# EAGLE board dynavo (EAGLE 7.4.0)
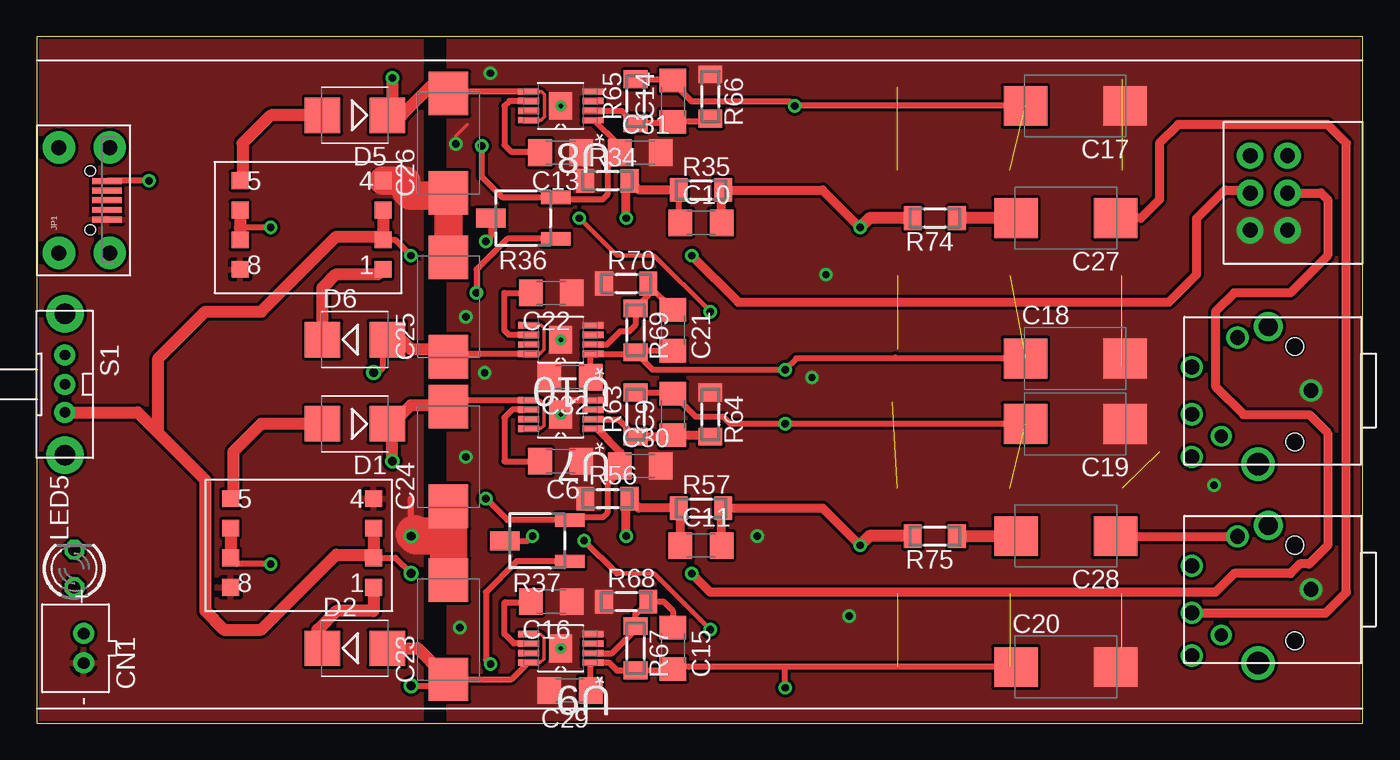
[diagram p0: board, top side]
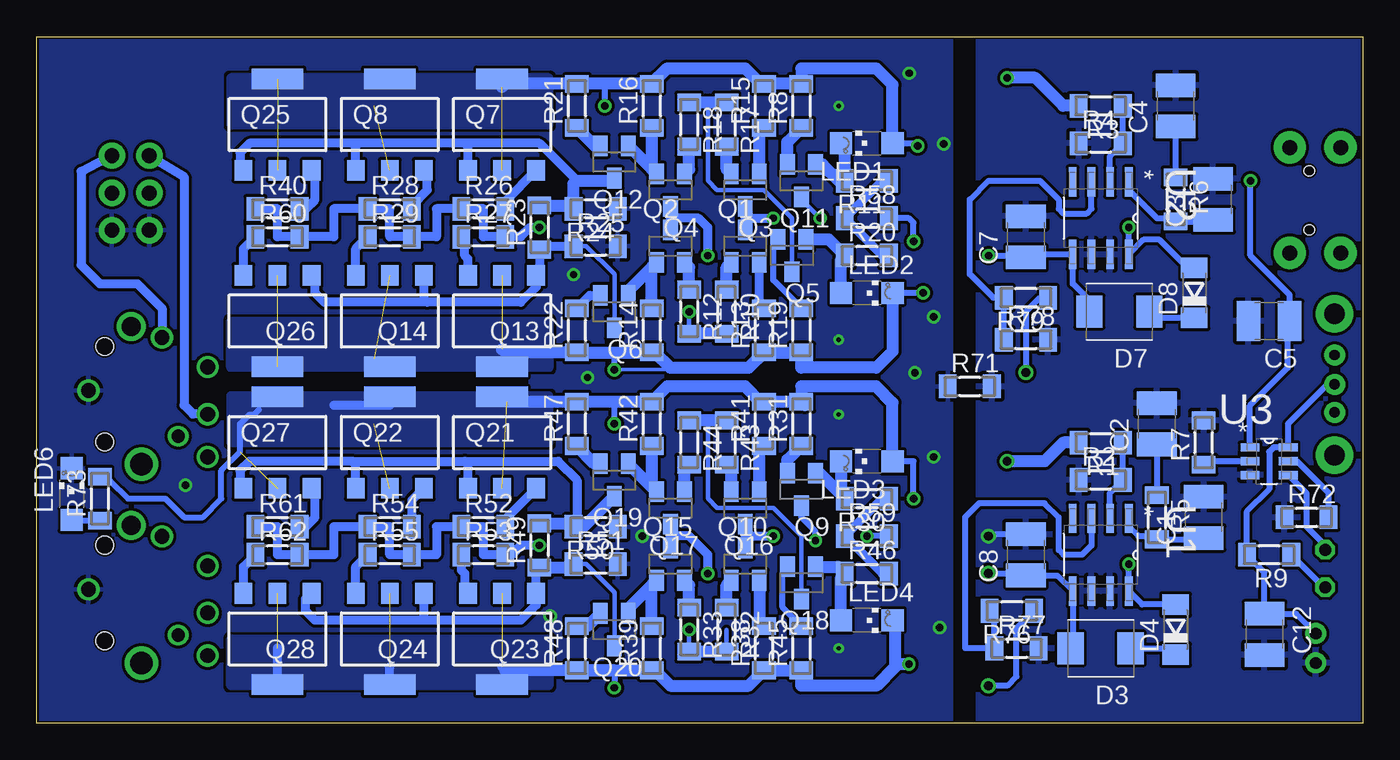
[diagram p1: board, bottom side, seen from below]

Size 90 x 46.6 mm. Coordinates in mm from the lower left corner, seen from the top.
Outline: 0,0 90,0 90,46.6 0,46.6 0,0
Copper layers (1*16): Top 0.035mm / dielectric 1.5mm / Bottom 0.035mm
Design rules "default *": minimum track width 10mil, minimum drill 12mil, track to track 8mil, track to pad 8mil, pad to pad 8mil, via to via 8mil, smd to smd 8mil, copper to edge 6mil, drill to drill 8mil, minimum pad ring 10mil, minimum via ring 8mil, stop-mask expansion 4mil, vias tented up to drill 0mil, thermal gap 10mil

## Footprints (pad centres in the part's own frame; a part is rotated, then mirrored left to right if it is on the bottom)
C1210 = smd 1.6 x 2.7: 1 -1.4,0; 2 1.4,0
C1206 = smd 1.6 x 1.8: 1 -1.4,0; 2 1.4,0
D/7343-31W = smd 2.95 x 2.7: + 3.375,0; - -3.375,0
JST-PH-2-THM = drill 0.8 pad 1.422: 1 1,0; 2 -1,0
SMB = smd 2.4 x 2.4: A 2.2,0; C -2.2,0
SMBJ = smd 1.78 x 2.16: A 2.04,0; C -2.03,0
SOD80C = smd 1.4 x 1.8: A 1.7,0; C -1.7,0
MICRO-B-SMT = smd 0.4 x 2: 1 1.3,-0.3; 2 0.65,-0.3; 3 0,-0.3; 4 -0.65,-0.3; 5 -1.3,-0.3 | drill 1.016 pad 2.2: P$6 -3.58,2.95; P$7 -3.58,-0.5; P$8 3.58,2.95; P$9 3.58,-0.5 | hole 0.7: -2,0.825; 2,0.825
CHIPLED_1206 = smd 1.5 x 1.5: A 0,-1.75; C 0,1.75
LED3MM = drill 0.813 octagon: A -1.27,0; K 1.27,0
SOT23 = smd 1 x 1.4: 1 -0.95,-1.1; 2 0.95,-1.1; 3 0,1.1
SOT23-BEC = smd 1 x 1.4: B -0.95,-1.1; C 0,1.1; E 0.95,-1.1
SOT223R_INFINEON = smd 1.2 x 1.4: 1 -2.311,-3.099; 2 0,-3.099; 3 2.311,-3.099 | smd 3.5 x 1.4: 4 0,3.099
MINI_MELF-0204W = smd 1.2 x 1.6: 1 -1.5,0; 2 1.5,0
3223G = smd 2 x 0.9: 1 -2.2,1.4; 3 -2.2,-1.4 | smd 2 x 1.3: 2 2.2,0
EG1213 = drill 0.7 pad 1.422: 1 -2,0; 2 0,0; 3 1.9,0 | drill 1.4 pad 2.54: MT1 -4.8,0; MT2 4.8,0
LPE4841 = smd 1.143 x 1.143: 1 0,6.02; 2 0,4.013; 3 0,2.007; 4 0,0; 5 9.703,0; 6 9.703,2.007; 7 9.703,4.013; 8 9.703,6.02
SOIC127P600X175-8N = smd 1.981 x 0.533: 1 -2.464,1.905; 2 -2.464,0.635; 3 -2.464,-0.635; 4 -2.464,-1.905; 5 2.464,-1.905; 6 2.464,-0.635; 7 2.464,0.635; 8 2.464,1.905
SOT-23-6 = smd 1.27 x 0.559: 1 -1.295,0.94; 2 -1.295,0; 3 -1.295,-0.94; 4 1.295,-0.94; 5 1.295,0; 6 1.295,0.94
SOP65P490X110-9N = smd 1.422 x 0.432: 1 -2.184,0.965; 2 -2.184,0.33; 3 -2.184,-0.33; 4 -2.184,-0.965; 5 2.184,-0.965; 6 2.184,-0.33; 7 2.184,0.33; 8 2.184,0.965 | smd 1.56 x 1.88: 9 0,0
FOXCON-PHONEJACK = drill 1: CS/ON -0.58,0; G -5.08,8.1; L -8.68,3.1; P$2 -6.68,0; R -3.48,0 | drill 0.9: P$1 -1.98,2 | drill 1.5: P$6 -0.08,4.5 | drill 1.3: P$7 -9.43,5.2 | hole 1.2: -8.08,7; -1.58,7
RK09 = drill 1.016 pad 1.778: G1 0,-2.54; G2 -2.54,-2.54; I1 0,2.54; I2 -2.54,2.54; O1 0,0; O2 -2.54,0

## Placement (x,y rotation side)
C1  [C1210]  10.79,13.97 90 bottom
C2  [C1210]  13.97,20.32 90 bottom
C3  [C1210]  10.16,35.56 90 bottom
C4  [C1210]  12.7,41.91 90 bottom
C5  [C1210]  6.35,27.3 180 bottom
C6  [C1206]  35.56,17.78 180 top
C7  [C1210]  22.86,33.02 90 bottom
C8  [C1210]  22.86,11.43 90 bottom
C9  [C1206]  43.18,20.95 90 top
C10  [C1206]  45.09,33.97 0 top
C11  [C1206]  45.09,12.06 0 top
C12  [C1210]  6.67,6.03 270 bottom
C13  [C1206]  35.56,38.73 180 top
C14  [C1206]  43.18,42.23 90 top
C15  [C1206]  43.18,5.08 270 top
C16  [C1206]  34.92,8.26 180 top
C17  [D/7343-31W]  70.48,41.91 180 top
C18  [D/7343-31W]  70.48,24.77 0 top
C19  [D/7343-31W]  70.48,20.32 180 top
C20  [D/7343-31W]  69.85,3.81 0 top
C21  [C1206]  43.18,26.67 270 top
C22  [C1206]  34.92,29.21 180 top
C23  [D/7343-31W]  27.94,6.35 90 top
C24  [D/7343-31W]  27.94,18.1 90 top
C25  [D/7343-31W]  27.94,28.26 90 top
C26  [D/7343-31W]  27.94,39.37 90 top
C27  [D/7343-31W]  69.85,34.29 180 top
C28  [D/7343-31W]  69.85,12.7 180 top
C29  [C1206]  36.2,2.22 180 top
C30  [C1206]  40.96,17.46 0 top
C31  [C1206]  40.96,38.73 0 top
C32  [C1206]  36.2,23.5 180 top
CN1  [JST-PH-2-THM]  3.17,5.08 90 top
D1  MBRS130LT3  [SMB]  21.59,20.32 180 top
D2  MBRS130LT3  [SMB]  21.59,5.08 0 top
D3  P6KEXX  [SMBJ]  17.78,5.08 180 bottom
D4  1n4148  [SOD80C]  12.7,6.35 90 bottom
D5  MBRS130LT3  [SMB]  21.59,41.27 180 top
D6  MBRS130LT3  [SMB]  21.59,26.04 0 top
D7  P6KEXX  [SMBJ]  16.51,27.94 180 bottom
D8  1n4148  [SOD80C]  11.43,29.21 90 bottom
JP1  [MICRO-B-SMT]  4.45,35.5 90 top
LED1  1.6V  [CHIPLED_1206]  33.66,39.37 90 bottom
LED2  1.6V  [CHIPLED_1206]  33.66,29.21 270 bottom
LED3  1.6V  [CHIPLED_1206]  33.66,17.78 90 bottom
LED4  1.6V  [CHIPLED_1206]  33.66,6.99 270 bottom
LED5  [LED3MM]  2.54,10.5 90 top
LED6  1.6V  [CHIPLED_1206]  87.63,15.56 0 bottom
Q1  2SJ74  [SOT23]  41.91,32.38 0 bottom
Q2  2SJ74  [SOT23]  46.99,32.38 0 bottom
Q3  2SK170  [SOT23]  41.91,36.2 180 bottom
Q4  2SK170  [SOT23]  46.99,36.2 180 bottom
Q5  BC850SMD  [SOT23-BEC]  38.73,31.75 180 bottom
Q6  BC850SMD  [SOT23-BEC]  50.8,27.94 180 bottom
Q7  PZTA06  [SOT223R_INFINEON]  58.42,40.64 0 bottom
Q8  PZTA06  [SOT223R_INFINEON]  66.04,40.64 0 bottom
Q9  2SA1015  [SOT23-BEC]  38.1,15.88 180 bottom
Q10  2SJ74  [SOT23]  41.91,10.79 0 bottom
Q11  2SA1015  [SOT23-BEC]  38.1,36.83 180 bottom
Q12  2SA1015  [SOT23-BEC]  50.8,38.1 180 bottom
Q13  2SA1015  [SOT223R_INFINEON]  58.42,27.3 180 bottom
Q14  2SA1015  [SOT223R_INFINEON]  66.04,27.3 180 bottom
Q15  2SJ74  [SOT23]  46.99,10.79 0 bottom
Q16  2SK170  [SOT23]  41.91,14.61 180 bottom
Q17  2SK170  [SOT23]  46.99,14.61 180 bottom
Q18  BC850SMD  [SOT23-BEC]  38.1,9.53 180 bottom
Q19  2SA1015  [SOT23-BEC]  50.8,16.51 180 bottom
Q20  BC850SMD  [SOT23-BEC]  50.8,6.35 180 bottom
Q21  PZTA06  [SOT223R_INFINEON]  58.42,19.05 0 bottom
Q22  PZTA06  [SOT223R_INFINEON]  66.04,19.05 0 bottom
Q23  2SA1015  [SOT223R_INFINEON]  58.42,5.71 180 bottom
Q24  2SA1015  [SOT223R_INFINEON]  66.04,5.71 180 bottom
Q25  PZTA06  [SOT223R_INFINEON]  73.66,40.64 0 bottom
Q26  2SA1015  [SOT223R_INFINEON]  73.66,27.3 180 bottom
Q27  PZTA06  [SOT223R_INFINEON]  73.66,19.05 0 bottom
Q28  2SA1015  [SOT223R_INFINEON]  73.66,5.71 180 bottom
R1  [MINI_MELF-0204W]  17.78,19.05 180 bottom
R2  [MINI_MELF-0204W]  17.78,16.51 0 bottom
R3  [MINI_MELF-0204W]  17.78,41.91 180 bottom
R4  [MINI_MELF-0204W]  17.78,39.37 0 bottom
R5  [MINI_MELF-0204W]  13.97,13.97 270 bottom
R6  [MINI_MELF-0204W]  12.7,35.56 270 bottom
R7  [MINI_MELF-0204W]  10.79,19.05 90 bottom
R8  402  [MINI_MELF-0204W]  38.1,41.91 90 bottom
R9  [MINI_MELF-0204W]  6.35,11.43 180 bottom
R10  200  [MINI_MELF-0204W]  43.18,27.94 270 bottom
R11  10k  [MINI_MELF-0204W]  33.66,36.83 180 bottom
R12  200  [MINI_MELF-0204W]  45.72,27.94 270 bottom
R13  5k  [MINI_MELF-0204W]  40.64,26.67 90 bottom
R14  5k  [MINI_MELF-0204W]  48.26,26.67 90 bottom
R15  5k  [MINI_MELF-0204W]  40.64,41.91 90 bottom
R16  5k  [MINI_MELF-0204W]  48.26,41.91 90 bottom
R17  200  [MINI_MELF-0204W]  43.18,40.64 270 bottom
R18  200  [MINI_MELF-0204W]  45.72,40.64 270 bottom
R19  402  [MINI_MELF-0204W]  38.1,26.67 90 bottom
R20  10k  [MINI_MELF-0204W]  33.66,31.75 0 bottom
R21  402  [MINI_MELF-0204W]  53.34,41.91 90 bottom
R22  402  [MINI_MELF-0204W]  53.34,26.67 90 bottom
R23  240  [MINI_MELF-0204W]  55.88,33.66 90 bottom
R24  3k  [MINI_MELF-0204W]  52.07,34.92 180 bottom
R25  3k  [MINI_MELF-0204W]  52.07,32.38 0 bottom
R26  20  [MINI_MELF-0204W]  59.69,34.92 0 bottom
R27  20  [MINI_MELF-0204W]  59.69,33.02 0 bottom
R28  20  [MINI_MELF-0204W]  66.04,34.92 0 bottom
R29  20  [MINI_MELF-0204W]  66.04,33.02 0 bottom
R30  10k  [MINI_MELF-0204W]  33.66,15.24 180 bottom
R31  402  [MINI_MELF-0204W]  38.1,20.32 90 bottom
R32  200  [MINI_MELF-0204W]  43.18,6.35 270 bottom
R33  200  [MINI_MELF-0204W]  45.72,6.35 270 bottom
R34  1k  [MINI_MELF-0204W]  38.73,36.83 0 top
R35  10k  [MINI_MELF-0204W]  45.09,36.2 0 top
R36  [3223G]  33.02,34.29 180 top
R37  [3223G]  33.97,12.38 180 top
R38  5k  [MINI_MELF-0204W]  40.64,5.08 90 bottom
R39  5k  [MINI_MELF-0204W]  48.26,5.08 90 bottom
R40  20  [MINI_MELF-0204W]  73.66,34.92 0 bottom
R41  5k  [MINI_MELF-0204W]  40.64,20.32 90 bottom
R42  5k  [MINI_MELF-0204W]  48.26,20.32 90 bottom
R43  200  [MINI_MELF-0204W]  43.18,19.05 270 bottom
R44  200  [MINI_MELF-0204W]  45.72,19.05 270 bottom
R45  402  [MINI_MELF-0204W]  38.1,5.08 90 bottom
R46  10k  [MINI_MELF-0204W]  33.66,10.16 0 bottom
R47  402  [MINI_MELF-0204W]  53.34,20.32 90 bottom
R48  402  [MINI_MELF-0204W]  53.34,5.08 90 bottom
R49  240  [MINI_MELF-0204W]  55.88,12.06 90 bottom
R50  3k  [MINI_MELF-0204W]  52.07,13.34 180 bottom
R51  3k  [MINI_MELF-0204W]  52.07,10.79 0 bottom
R52  20  [MINI_MELF-0204W]  59.69,13.34 0 bottom
R53  20  [MINI_MELF-0204W]  59.69,11.43 0 bottom
R54  20  [MINI_MELF-0204W]  66.04,13.34 0 bottom
R55  20  [MINI_MELF-0204W]  66.04,11.43 0 bottom
R56  1k  [MINI_MELF-0204W]  38.73,15.24 0 top
R57  10k  [MINI_MELF-0204W]  45.09,14.61 0 top
R58  10k  [MINI_MELF-0204W]  33.66,34.29 0 bottom
R59  10k  [MINI_MELF-0204W]  33.66,12.7 0 bottom
R60  20  [MINI_MELF-0204W]  73.66,33.02 0 bottom
R61  20  [MINI_MELF-0204W]  73.66,13.34 0 bottom
R62  20  [MINI_MELF-0204W]  73.66,11.43 0 bottom
R63  [MINI_MELF-0204W]  40.64,20.95 90 top
R64  [MINI_MELF-0204W]  45.72,20.95 270 top
R65  [MINI_MELF-0204W]  40.64,42.23 90 top
R66  [MINI_MELF-0204W]  45.72,42.55 270 top
R67  [MINI_MELF-0204W]  40.64,5.08 270 top
R68  [MINI_MELF-0204W]  40.01,8.26 0 top
R69  [MINI_MELF-0204W]  40.64,26.67 270 top
R70  [MINI_MELF-0204W]  40.01,29.84 0 top
R71  [MINI_MELF-0204W]  26.67,22.86 0 bottom
R72  [MINI_MELF-0204W]  3.81,13.97 0 bottom
R73  402  [MINI_MELF-0204W]  85.72,15.24 90 bottom
R74  20  [MINI_MELF-0204W]  60.96,34.29 180 top
R75  20  [MINI_MELF-0204W]  60.96,12.7 180 top
R76  [MINI_MELF-0204W]  23.81,7.62 180 bottom
R77  [MINI_MELF-0204W]  23.5,5.08 0 bottom
R78  [MINI_MELF-0204W]  22.86,26.04 0 bottom
R79  [MINI_MELF-0204W]  22.86,28.89 180 bottom
S1  EG1213  [EG1213]  1.91,23 270 top
T1  LPE4841  [LPE4841]  22.86,15.24 180 top
T2  LPE4841  [LPE4841]  23.5,36.83 180 top
U1  LT1373CS8PBF  [SOIC127P600X175-8N]  17.78,11.43 270 bottom
U2  LT1373CS8PBF  [SOIC127P600X175-8N]  17.78,34.29 270 bottom
U3  BQ21040  [SOT-23-6]  6.35,17.78 0 bottom
U7  TPS7A4901DGNR  [SOP65P490X110-9N]  35.56,20.95 180 top
U8  TPS7A4901DGNR  [SOP65P490X110-9N]  35.56,41.91 180 top
U9  TPS7A3001DGNR  [SOP65P490X110-9N]  35.56,5.08 180 top
U10  TPS7A3001DGNR  [SOP65P490X110-9N]  35.56,26.04 180 top
U$2  HPJACK  [FOXCON-PHONEJACK]  78.4,4 270 top
U$3  HPJACK  [FOXCON-PHONEJACK]  78.4,17.5 270 top
U$4  ALPS_RK09  [RK09]  84.9,36 0 top

## Library data of the parts
C1-C32 R1-R35 R38-R79 T1 T2 U3 U$2 U$3 = Vwvwbg
CN1 S1 = adafruit
D1-D8 = diode
JP1 = SparkFun-Connectors; PROD_ID: CONN-09900
LED1-LED6 = led
Q1-Q4 Q10 Q15-Q17 = transistor-small-signal
Q5-Q8 Q18 Q20-Q22 Q25 Q27 = tranzistory SMD NPN
Q9 Q11-Q14 Q19 Q23 Q24 Q26 Q28 = tranzistory SMD PNP
R36 R37 = pot
U1 U2 = LTC_By_element14_Batch_1; MPN: LT1373CS8#PBF; OC_FARNELL: 1273739; OC_NEWARK: 57M3629; PACKAGE: SOIC-8; SUPPLIER: Linear Technology
U7 U8 = Texas Instruments_By_element14_Batch_1; MPN: TPS7A4901DGNR; OC_FARNELL: -; OC_NEWARK: 01T0879; PACKAGE: MSOP-8; SUPPLIER: Texas Instruments
U9 U10 = Texas Instruments_By_element14_Batch_1; MPN: TPS7A3001DGNR; OC_FARNELL: -; OC_NEWARK: 01T0878; PACKAGE: MSOP-8; SUPPLIER: Texas Instruments
U$4 = audio-pots

## Nets
+15V: C14.2 C17.+ C31.1 LED1.A Q7.2 Q7.4 Q8.2 Q8.4 Q25.2 Q25.4 R8.2 R15.2 R16.2 R21.2 R36.3 R65.2 U8.1
-15V: C18.- C21.2 C32.1 LED2.C Q13.2 Q13.4 Q14.2 Q14.4 Q26.2 Q26.4 R13.1 R14.1 R19.1 R22.1 R36.1 R69.2 U10.1
AGND: C1.2 C2.2 C3.2 C4.2 C5.2 C7.2 C8.2 C12.2 C23.+ C24.- C25.+ C26.- CN1.2 JP1.5 R2.1 R4.1 R7.2 R71.2 R72.1 R77.2 R78.2 T1.4 T1.8 T2.4 T2.8 U1.6 U1.7 U2.6 U2.7 U3.3
GND: C6.1 C13.1 C16.1 C17.- C18.+ C19.- C20.+ C22.1 C29.2 C30.2 C31.2 C32.2 LED6.C R24.1 R25.2 R34.1 R50.1 R51.2 R56.1 R64.1 R66.1 R68.1 R70.1 R71.1 U7.4 U7.9 U8.4 U8.9 U9.4 U9.9 U10.4 U10.9 U$2.G U$3.G U$4.G1 U$4.G2
N$1: D3.C D4.C
N$2: C7.1 C8.1 D3.A D7.A S1.3 T1.2 T1.3 T2.2 T2.3 U1.5 U2.5
N$3: D4.A T1.6 T1.7 U1.8
N$4: D2.C T1.1
N$5: D1.A T1.5
N$6: R1.1 R2.2 U1.2
N$7: R7.1 U3.2
N$8: D7.C D8.C
N$9: C10.2 R26.1 R27.2 R28.1 R29.2 R35.2 R40.1 R60.2 R74.2
N$10: D8.A T2.6 T2.7 U2.8
N$11: D6.C T2.1
N$12: D5.A T2.5
N$13: R3.1 R4.2 U2.2
N$14: C1.1 R5.2 U1.1
N$15: C3.1 R6.2 U2.1
N$16: C2.1 R5.1
N$17: C4.1 R6.1
N$18: Q7.3 R26.2
N$19: Q8.3 R28.2
N$20: Q25.3 R40.2
N$21: LED5.A R9.1
N$23: C5.1 JP1.1 U3.1
N$24: Q13.3 R27.1
N$25: Q14.3 R29.1
N$26: Q26.3 R60.1
N$28: Q7.1 Q8.1 Q12.C Q25.1 R23.2 R24.2
N$29: Q6.C Q13.1 Q14.1 Q26.1 R23.1 R25.1
N$30: Q12.E R21.1
N$31: Q6.E R22.2
N$32: Q5.E R19.2
N$33: LED2.A Q5.B R20.1
N$34: Q5.C R17.1 R18.1
N$35: Q4.2 Q12.B R16.1
N$36: Q2.1 Q6.B R14.2
N$37: Q11.C R10.2 R12.2
N$38: Q11.E R8.1
N$39: LED1.C Q11.B R11.2
N$40: Q2.3 Q4.3 U$4.O2
N$41: R36.2 R58.2
N$42: R37.2 R59.2
N$43: R11.1 R20.2 R58.1
N$44: C10.1 Q1.3 Q3.3 R34.2 R35.1
N$45: Q1.1 R10.1
N$46: Q2.2 R12.1
N$47: Q1.2 R13.2
N$48: Q3.1 R15.1
N$49: Q3.2 R17.2
N$50: Q4.1 R18.2
N$51: C11.2 R52.1 R53.2 R54.1 R55.2 R57.2 R61.1 R62.2 R75.2
N$52: Q21.3 R52.2
N$53: Q22.3 R54.2
N$54: Q27.3 R61.2
N$56: Q23.3 R53.1
N$57: Q24.3 R55.1
N$58: Q28.3 R62.1
N$60: Q19.C Q21.1 Q22.1 Q27.1 R49.2 R50.2
N$61: Q20.C Q23.1 Q24.1 Q28.1 R49.1 R51.1
N$62: Q19.E R47.1
N$63: Q20.E R48.2
N$64: Q18.E R45.2
N$65: LED4.A Q18.B R46.1
N$66: Q18.C R43.1 R44.1
N$67: Q17.2 Q19.B R42.1
N$68: Q15.1 Q20.B R39.2
N$69: Q9.C R32.2 R33.2
N$70: Q9.E R31.1
N$71: LED3.C Q9.B R30.2
N$72: Q15.3 Q17.3 U$4.O1
N$73: C24.+ D1.C R1.2 U7.5 U7.8
N$74: C23.- D2.A R76.1 U9.5 U9.8
N$75: R30.1 R46.2 R59.1
N$76: C11.1 Q10.3 Q16.3 R56.2 R57.1
N$77: Q10.1 R32.1
N$78: Q15.2 R33.1
N$79: Q10.2 R38.2
N$80: Q16.1 R41.1
N$81: Q16.2 R43.2
N$82: Q17.1 R44.2
N$83: C12.1 CN1.1 R9.2 S1.2 U3.6
N$84: LED5.K U3.4
N$85: U$3.R U$4.I2
N$86: U$3.L U$4.I1
N$87: C26.+ D5.C R3.2 U8.5 U8.8
N$88: C25.- D6.A R79.1 U10.5 U10.8
N$89: C9.1 R63.1 R64.2 U7.2
N$90: C14.1 R65.1 R66.2 U8.2
N$91: C15.1 R67.1 R68.2 U9.2
N$92: C16.2 U9.6
N$93: C13.2 U8.6
N$94: C27.- U$2.R
N$95: C21.1 R69.1 R70.2 U10.2
N$96: C6.2 U7.6
N$97: C28.- U$2.L
N$98: C22.2 U10.6
N$99: R72.2 U3.5
N$100: LED6.A R73.1
N$101: C27.+ R74.1
N$102: C28.+ R75.1
N$103: R76.2 R77.1 U1.3
N$104: R78.1 R79.2 U2.3
V+: C9.2 C19.+ C30.1 LED3.A Q21.2 Q21.4 Q22.2 Q22.4 Q27.2 Q27.4 R31.2 R37.3 R41.2 R42.2 R47.2 R63.2 R73.2 U7.1
V-: C15.2 C20.- C29.1 LED4.C Q23.2 Q23.4 Q24.2 Q24.4 Q28.2 Q28.4 R37.1 R38.1 R39.1 R45.1 R48.1 R67.2 U9.1

## Tracks (layer width: path | path; a pad name or v marks a point on that pad's centre or on a via)
+15V  (via drill 0.5)  (3 unrouted)
  Top 0.254: 51.6,41.74 v51.44,41.91
  Top 0.406: C14.2 43.18,43.18 | 42.95,43.73 43.18,43.18 | v30.2,39.2 30.2,37.11 31.62,35.69 R36.3 35.35,35.56 38.42,35.56 38.73,35.88 38.73,37.78 39.37,38.42 39.37,39.37 | C17.+ v51.44,41.91 51.12,42.23 44.45,42.23 42.95,43.73 | C31.1 39.56,39.18 39.37,39.37 | 43.18,43.18 42.63,43.73 R65.2 42.95,43.73 | U8.1 37.8,40.95 39.37,39.37
  Bottom 0.406: v51.44,41.91 51.44,43.41 | LED1.A 30.37,39.37 v30.2,39.2
  Bottom 0.813: 37.87,43.18 R8.2 | R8.2 R15.2 40.87,43.41 41.91,44.45 47.22,44.45 R16.2 51.44,43.41 R21.2 58.19,43.41 58.42,43.18 | LED1.A 31.91,43.34 33.02,44.45 38.1,44.45 R8.2
  pour Bottom (no thermals): 55.24,43.81 76.83,43.81 76.83,40.64 55.24,40.64
-15V  (via drill 0.5)  (3 unrouted)
  Top 0.305: 58.29,24.89 58.42,24.77
  Top 0.406: C21.2 40.74,25.27 R69.2 | R69.2 40.54,25.07 U10.1 37.59,24.92 C32.1 | R69.2 41.8,24 v50.8,24 51.56,24.77 58.42,24.77 C18.- | R36.1 31.94,32.89 29.84,30.8 v29.84,29.21
  Bottom 0.254: R69.2 40.74,25.17 41.91,24 v50.8,24
  Bottom 0.406: v50.8,24 50.8,25 | v29.84,29.21 LED2.C
  Bottom 0.813: 58.42,25.4 58.19,25.17 R22.1 R14.1 48.03,25.17 46.99,24.13 41.68,24.13 R69.2 R19.1 38.1,24.13 33.02,24.13 31.91,25.25 LED2.C
  pour Bottom (no thermals): 55.24,24.13 76.83,24.13 76.83,27.3 55.24,27.3
AGND  (via drill 0.6)
  Top 0.254: C26.- 25.49,35.99 25.32,35.83
  Top 0.406: T2.8 14.28,30.81 | v25.4,12.7 25.4,15.24
  Top 0.813: 27.11,36.83 C26.- | C23.+ 27.94,10.16
  Top 1.93: 27.94,33.98 C26.- C25.+ | T2.4 25.02,36.83 25.06,36.78 25.06,36.09 25.32,35.83 27.25,35.83 27.35,35.93
  Top 2.54: C24.- 27.94,12.7 | 27.94,10.16 27.94,12.7 | 27.94,12.7 25.77,12.7 25.65,12.82 25.65,12.84
  Bottom 0.406: C8.2 25.27,12.83 v25.4,12.7
  pour Bottom: 0,46.99 0,0 26.04,0 26.04,46.99
  pour Top: 0,46.99 26.04,46.99 26.04,0 0,0
GND  (via drill 0.3, 0.5)
  Top 0.254: v28.45,39.34 28.45,39.88 29.21,40.64
  Top 0.406: U7.4 35.89,21.92 35.56,21.59 U7.9
  other vias: 48.9,12.7 29.12,18.07 28.71,6.49 30.77,44.13 30.39,23.79 29.12,27.59 79.92,16.16 52.62,23.47 53.57,30.45 55.16,7.28 35.56,41.91 35.56,26.04 35.56,20.95 35.56,5.08
  pour Bottom (rank 2): 27.94,46.99 90.17,46.99 90.17,0 27.94,0
  pour Top (no thermals): 27.94,46.99 90.17,46.99 90.17,0 27.94,0
N$1
  Bottom 0.406: D3.C 13.13,5.08 D4.C
N$2  (via drill 0.5, 0.6)
  Top 0.406: T2.2 24.33,32.82 v25.4,31.75 | T1.2 24.33,11.23 v25.4,10.16
  Top 0.813: T2.3 T2.2 23.29,33.02 20.32,33.02 15.24,27.94 11.43,27.94 8.25,24.76 8.25,19.69 | T1.3 T1.2 22.66,11.43 20.32,11.43 15.24,6.35 12.7,6.35 11.43,7.62 11.43,16.51 8.25,19.69 | S1.3 6.84,21.1 8.25,19.69
  Bottom 0.406: D7.A 18.55,28.71 19.68,29.84 U2.5 22.65,31.83 C7.1 22.99,31.75 v25.4,31.75 | D3.A 19.68,5.21 U1.5 20.75,10.03 C8.1 22.99,10.16 v25.4,10.16
N$3  (via drill 0.5)
  Top 0.406: v15.88,10.79 13.59,10.79 T1.7
  Top 0.813: T1.6 T1.7
  Bottom 0.406: v15.88,10.79 U1.8 14.96,8.05 D4.A
N$4
  Top 0.813: T1.1 22.86,7.62 20.32,7.62 19.05,6.35 19.05,5.42 D2.C
N$5
  Top 0.813: D1.A 15.24,20.32 13.34,18.41 13.34,15.42 T1.5
N$6
  Bottom 0.406: U1.2 17.14,15.64 R2.2 R1.1
N$7
  Bottom 0.406: U3.2 10.56,17.78 R7.1
N$8
  Bottom 0.406: D8.C 14.05,27.51 D7.C
N$9  (via drill 0.5)
  Top 0.61: C10.2 46.48,36.3 R35.2 53.34,36.2 v55.88,33.66
  Top 0.813: v55.88,33.66 56.52,34.29 R74.2
  Bottom 0.61: R40.1 73.66,34.92 73.66,33.02 R60.2 69.85,33.02 69.85,34.92 R28.1 66.04,34.92 66.04,33.02 R29.2 62.87,33.02 62.87,34.92 R26.1 59.69,34.92 59.69,33.02 R27.2 57.15,33.02 56.52,33.66 v55.88,33.66
N$10  (via drill 0.5)
  Top 0.406: v15.88,33.66 13.79,33.66
  Top 0.813: T2.6 13.79,33.66 T2.7
  Bottom 0.406: v15.88,33.66 U2.8 14.88,32.82 T2.7 11.88,30.91 D8.A
N$11
  Top 0.813: D6.C 19.39,29.55 20.32,30.48 23.16,30.48 T2.1
N$12
  Top 0.813: D5.A 15.88,41.27 13.97,39.37 13.97,37.01 T2.5
N$13
  Bottom 0.406: U2.2 17.14,38.51 R4.2 R3.1
N$14
  Bottom 0.406: U1.1 15.88,13.34 15.24,12.7 14.2,12.7 R5.2 11.66,12.47 11.43,12.7 10.93,12.7 C1.1
N$15
  Bottom 0.406: U2.1 15.88,36.2 13.97,34.29 12.93,34.29 R6.2 10.26,34.06 C3.1
N$16
  Bottom 0.406: C2.1 R5.1
N$17
  Bottom 0.406: R6.1 C4.1
N$18
  Bottom 0.61: R26.2 58.19,35.46 Q7.3
N$19
  Bottom 0.61: R28.2 64.54,35.16 63.5,36.2 63.5,37.31 Q8.3
N$20
  Bottom 0.61: R40.2 71.75,34.92 71.12,35.56 71.12,37.31 Q25.3
N$21
  Bottom 0.406: LED5.A 2.65,9.23 R9.1
N$23  (via drill 0.5)
  Top 0.406: v7.62,36.83 4.78,36.83 JP1.1
  Bottom 0.406: U3.1 7.64,21.57 5.08,24.13 5.08,27.18 C5.1 4.95,29.08 7.62,31.75 v7.62,36.83
N$24
  Bottom 0.61: Q13.3 60.73,31.52 60.96,31.75 60.96,32.79 R27.1
N$25
  Bottom 0.61: Q14.3 68.35,32.21 R29.1
N$26
  Bottom 0.61: Q26.3 75.97,32.21 R60.1
N$28
  Bottom 0.61: 60.96,39.37 55.88,39.37 53.34,36.83 | 60.96,39.37 68.58,39.37 | 68.58,39.37 75.56,39.37 76.2,38.73 76.2,37.77 Q25.1 | Q8.1 68.35,39.14 68.58,39.37 | Q7.1 60.73,39.14 60.96,39.37
  Bottom 0.813: R23.2 53.8,35.16 R24.2 53.57,36.6 53.34,36.83 50.97,36.83 Q12.C
N$29
  Bottom 0.305: R25.1 52.7,32.38 50.8,30.48 Q6.C
  Bottom 0.61: 63.5,28.57 57.15,28.57 56.11,29.62 Q13.1 55.88,30.63 R23.1 55.65,32.38 R25.1 | 63.5,28.57 70.48,28.57 71.12,29.21 71.12,30.18 Q26.1 | Q14.1 63.73,28.8 63.5,28.57
N$30
  Bottom 0.813: Q12.E 52.13,39.2 R21.1
N$31
  Bottom 0.61: R22.2 52.47,29.04 Q6.E
N$32
  Bottom 0.406: R19.2 40.01,30.07 40.01,32.38 39.69,32.7 Q5.E
N$33
  Bottom 0.813: LED2.A 35.41,31.5 R20.1 36.26,32.85 Q5.B
N$34
  Bottom 0.305: 44.45,42.14 44.45,36.83 43.81,36.2 40.64,36.2 38.73,34.29 Q5.C
  Bottom 0.813: R17.1 44.45,42.14 R18.1
N$35
  Bottom 0.813: R16.1 48.26,37.62 Q4.2 Q12.B
N$36
  Bottom 0.813: R14.2 48.26,30.96 Q2.1 49.85,29.38 Q6.B
N$37  (via drill 0.5)
  Top 0.305: v45.72,27.94 41.91,31.75 39.37,31.75 v36.83,34.29
  Bottom 0.305: Q11.C 38.1,35.56 v36.83,34.29 | R10.2 44.22,26.44 44.45,26.67 45.72,26.67 v45.72,27.94
  Bottom 0.813: R10.2 R12.2
N$38
  Bottom 0.813: Q11.E 39.05,39.46 R8.1
N$39
  Bottom 0.813: LED1.C 35.16,39.12 R11.2 35.56,36.83 36.66,37.93 Q11.B
N$40  (via drill 0.5)
  Top 0.61: U$4.O2 82.17,36.2 80.64,36.2 78.74,34.29 78.74,30.48 76.83,28.57 47.62,28.57 v44.45,31.75
  Bottom 0.61: Q4.3 46.99,34.29 | 46.99,34.29 Q2.3 | v44.45,31.75 44.45,33.66 45.09,34.29 46.99,34.29
N$41  (via drill 0.5)
  Top 0.406: R36.2 30.82,33.04 v30.48,32.7
  Bottom 0.406: v30.48,32.7 30.48,33.97 30.8,34.29 R58.2
  Bottom 0.61: R58.2 31.81,34.29
N$42  (via drill 0.5)
  Top 0.406: R37.2 33.34,12.38 v33.66,12.7
  Bottom 0.406: R59.2 v33.66,12.7
N$43
  Bottom 0.61: R11.1 32.62,36.83 R58.1 32.62,31.75 R20.2
N$44  (via drill 0.5)
  Top 0.406: C10.1 43.59,34.07 R35.1
  Top 0.61: v40.01,34.29 40.01,36.6 R34.2 40.87,36.2 R35.1
  Bottom 0.61: 41.91,34.29 Q1.3 | Q3.3 41.91,34.29 | 41.91,34.29 v40.01,34.29
N$45
  Bottom 0.813: R10.1 43.18,30.96 Q1.1
N$46
  Bottom 0.813: R12.1 45.72,30.96 Q2.2
N$47
  Bottom 0.61: R13.2 40.96,28.49 Q1.2
N$48
  Bottom 0.813: Q3.1 40.96,40.09 R15.1
N$49
  Bottom 0.305: 43.18,37.62 Q3.2
  Bottom 0.813: 43.18,37.62 R17.2
N$50
  Bottom 0.305: 45.72,37.62 Q4.1
  Bottom 0.813: 45.72,37.62 R18.2
N$51  (via drill 0.5)
  Top 0.61: C11.2 46.48,14.71 R57.2 53.34,14.61 v55.88,12.06
  Top 0.813: v55.88,12.06 56.52,12.7 R75.2
  Bottom 0.61: 75.42,13.6 R61.1 73.66,13.34 73.66,11.43 R62.2 69.85,11.43 69.85,13.34 R54.1 66.04,13.34 66.04,11.43 R55.2 62.87,11.43 62.87,13.34 R52.1 59.69,13.34 59.69,11.43 R53.2 57.78,11.43 57.15,12.06 v55.88,12.06
N$52
  Bottom 0.61: R52.2 58.19,13.87 Q21.3
N$53
  Bottom 0.61: R54.2 64.54,15.14 Q22.3
N$54
  Bottom 0.61: R61.2 71.75,13.34 71.12,13.97 71.12,15.72 Q27.3
N$56
  Bottom 0.61: R53.1 61.19,10.39 60.96,10.16 60.96,9.04 Q23.3
N$57
  Bottom 0.61: Q24.3 68.35,10.62 R55.1
N$58
  Bottom 0.61: Q28.3 75.97,10.62 R62.1
N$60
  Bottom 0.61: 60.73,16.28 Q21.1 60.73,17.55 60.96,17.78 | 68.58,17.78 75.56,17.78 76.2,17.14 76.2,16.18 Q27.1 | Q22.1 68.35,17.55 68.58,17.78 | 68.58,17.78 60.96,17.78 | 60.96,17.78 54.61,17.78 53.34,16.51 53.34,13.56 R50.2
  Bottom 0.813: R49.2 53.8,13.56 R50.2 52.88,13.34 Q19.C
N$61
  Bottom 0.305: R51.1 52.7,10.79 50.8,8.89 Q20.C
  Bottom 0.61: 63.5,6.99 57.15,6.99 56.11,8.03 Q23.1 56.11,10.34 R49.1 | 63.5,6.99 71.12,6.99 71.75,7.62 71.75,8.41 Q28.1 | Q24.1 63.73,7.21 63.5,6.99
  Bottom 0.813: R49.1 53.8,10.56 R51.1
N$62
  Bottom 0.813: Q19.E 52.13,17.61 R47.1
N$63
  Bottom 0.813: R48.2 52.62,6.58 Q20.E
N$64
  Bottom 0.406: R45.2 39.37,7.85 39.37,10.16 39.05,10.48 Q18.E
N$65
  Bottom 0.813: LED4.A 35.41,9.91 R46.1 35.62,10.62 Q18.B
N$66
  Bottom 0.305: Q18.C 38.1,12.7 40.01,14.61 43.81,14.61 44.45,15.24 44.45,20.55
  Bottom 0.813: R43.1 44.45,20.55 R44.1
N$67
  Bottom 0.813: R42.1 48.26,16.02 Q17.2 Q19.B
N$68
  Bottom 0.813: R39.2 48.26,9.38 Q15.1 49.85,7.79 Q20.B
N$69  (via drill 0.5)
  Top 0.305: v45.72,6.35 41.91,10.16 39.37,10.16
  Top 0.406: 39.37,10.16 v37.15,12.38
  Bottom 0.305: 43.18,6.35 R32.2 | v45.72,6.35 R33.2
  Bottom 0.406: v37.15,12.38 37.15,13.02 38.1,13.97 Q9.C 38.1,15.24
  Bottom 0.813: R32.2 R33.2
N$70
  Bottom 0.813: Q9.E 39.05,17.87 R31.1
N$71
  Bottom 0.813: Q9.B 36.89,16.98 R30.2 35.41,15.49 LED3.C
N$72  (via drill 0.5)
  Top 0.61: U$4.O1 87.19,36 87.63,35.56 87.63,31.75 85.09,29.21 81.28,29.21 80.01,27.94 80.01,22.86 81.92,20.95 86.36,20.95 87.63,19.68 87.63,12.06 86.36,10.79 85.72,10.79 85.09,10.16 81.28,10.16 80.01,8.89 45.72,8.89 v44.45,10.16
  Bottom 0.61: Q17.3 46.99,12.7 | 46.99,12.7 Q15.3 | v44.45,10.16 44.45,11.43 45.72,12.7 46.99,12.7
N$73  (via drill 0.6)
  Top 0.254: U7.8 34.19,19.99 34.43,20.21 34.43,21.69 34.19,21.9 33.4,21.9 U7.5
  Top 0.406: U7.5 28.39,21.92 C24.+
  Top 0.813: C24.+ 27.82,21.59 25.4,21.59 24.13,20.32 D1.C 24.13,19.98 v24.13,17.78
  Bottom 0.813: R1.2 20.32,19.05 21.59,17.78 v24.13,17.78
N$74  (via drill 0.6)
  Top 0.254: U9.8 34.16,4.12 34.43,4.35 34.43,5.83 34.2,6.03 33.39,6.03 U9.5
  Top 0.406: C23.- 32.24,2.98 U9.8 | v25.4,2.54 26.67,2.54 27.52,3.39 27.94,3.81
  Top 0.813: D2.A 25.84,5.08 27.52,3.39 C23.-
  Bottom 0.406: v25.4,2.54 24.13,2.54 23.5,3.17 23.5,6.44 R76.1
N$75
  Bottom 0.61: R30.1 32.62,15.24 R59.1 32.62,10.16 R46.2
N$76  (via drill 0.5)
  Top 0.61: C11.1 43.69,14.71 R57.1 40.87,14.61 R56.2 40.01,15.01 v40.01,12.7
  Bottom 0.61: Q10.3 41.91,12.7 | Q16.3 41.91,12.7 | 41.91,12.7 v40.01,12.7
N$77
  Bottom 0.813: R32.1 43.18,9.38 Q10.1
N$78
  Bottom 0.813: R33.1 45.72,9.38 Q15.2
N$79
  Bottom 0.813: Q10.2 40.96,6.9 R38.2
N$80
  Bottom 0.813: Q16.1 40.96,18.5 R41.1
N$81
  Bottom 0.813: Q16.2 42.86,17.23 R43.2
N$82
  Bottom 0.813: Q17.1 46.04,17.23 R44.2
N$83
  Bottom 0.406: S1.2 2.4,23 5.08,20.32 5.08,18.75 U3.6 6.04,18.72 6.35,18.41 6.35,15.88 7.85,14.38 R9.2 6.67,10.25 C12.1 4.53,7.43 CN1.1
N$84
  Bottom 0.406: U3.4 3.81,15.6 3.81,13.34 2.54,12.06 LED5.K
N$85
  Bottom 0.61: U$4.I2 80.01,37.09 80.01,21.59 79.4,20.98 U$3.R
N$86
  Bottom 0.61: U$4.I1 86.88,37.47 87,37.47 87,31.11 85.72,29.84 83.19,29.84 81.5,28.16 U$3.L
N$87  (via drill 0.5)
  Top 0.254: U8.8 34.23,40.95 34.45,41.17 34.45,42.68 34.26,42.88 U8.5
  Top 0.406: U8.5 28.07,42.88 C26.+
  Top 0.813: D5.C 24.45,41.27 | 24.45,41.27 24.77,41.27 26.67,43.18 27.5,43.18 C26.+ | v24.13,43.81 24.13,41.59 24.45,41.27
  Bottom 0.813: R3.2 20.32,41.91 22.23,43.81 v24.13,43.81
N$88  (via drill 0.6)
  Top 0.254: U10.5 33.39,27.01 34.22,27.01 34.42,26.81 34.42,25.36 34.13,25.07 U10.8
  Top 0.406: U10.8 28.13,25.07 C25.- | v22.86,23.81 23.18,23.81 23.5,24.13 23.5,25.74 D6.A
  Top 0.813: D6.A 24.77,26.04 25.4,25.4 27.42,25.4 C25.-
  Bottom 0.406: R79.1 21.91,28.89 22.86,27.94 v22.86,23.81
N$89
  Top 0.406: U7.2 39.47,20.62 R63.1
  Top 0.61: R63.1 43.08,19.45 C9.1 45.62,19.55 R64.2
N$90
  Top 0.406: U8.2 39.7,41.58 40.64,40.64 R65.1 43.08,40.73 C14.1 45.62,40.83 R66.2
N$91
  Top 0.406: U9.2 39.04,4.75 40.64,6.35 R67.1 40.64,7.39 R68.2 42.55,8.26 43.18,7.62 C15.1
N$92
  Top 0.406: U9.6 32.39,5.41 31.75,6.05 31.75,8.15 31.8,8.2 33.47,8.2 C16.2
N$93
  Top 0.406: U8.6 32.08,42.24 31.75,41.91 31.75,39.25 32.2,38.8 34.09,38.8 C13.2
N$94
  Top 0.61: U$2.R 87.49,7.48 88.9,8.89 88.9,39.37 87.63,40.64 77.47,40.64 76.2,39.37 76.2,35.56 74.93,34.29 C27.-
N$95
  Top 0.406: C21.1 41.51,29.75 R70.2 41.51,29.04 R69.1 40.64,27.04 40.2,26.6 39.6,26.6 38.7,25.7 U10.2
N$96
  Top 0.406: U7.6 32.28,21.29 31.75,20.75 31.75,17.78 C6.2
N$97
  Top 0.61: 73.25,12.68 U$2.L
  Top 1.93: 73.25,12.68 C28.-
N$98
  Top 0.406: U10.6 32.05,26.36 31.75,26.67 31.75,29.21 C22.2
N$99
  Bottom 0.406: R72.2 2.31,15.64 4.45,17.78 U3.5
N$100
  Bottom 0.406: R73.1 87.56,13.74 LED6.A
N$101
  Top 0.813: C27.+ R74.1
N$102
  Top 0.813: R75.1 C28.+
N$103
  Bottom 0.406: U1.3 18.41,12.06 19.05,11.43 20.32,11.43 20.64,11.75 20.64,13.97 21.59,14.92 26.04,14.92 26.99,13.97 26.99,5.08 R77.1 25,7.3 R76.2
N$104
  Bottom 0.406: R78.1 R79.2 25.08,28.89 26.67,30.48 26.67,35.56 25.4,36.83 21.91,36.83 20.64,35.56 20.64,34.92 20.32,34.61 18.73,34.61 18.41,34.92 U2.3
V+  (via drill 0.5)  (3 unrouted)
  Top 0.254: U7.1 37.81,19.99 39.4,18.4
  Top 0.406: R63.2 43.08,22.45 C9.2 44.73,20.8 46.6,20.8 47.08,20.32 v50.8,20.32 C19.+ | v30.48,15.24 31.94,13.78 R37.3 36.36,13.97 38.42,13.97 38.73,14.29 38.73,16.19 39.69,17.14 39.69,18.41 38.11,19.99 U7.1 | 39.4,18.4 39.4,17.94 C30.1
  Bottom 0.406: v50.8,20.32 50.8,21.82 | R73.2 85,16.42 83.82,15.24 81.28,15.24 80.01,13.97 78.74,13.97 77.47,15.24 77.47,17.14 76.2,18.41 76.2,20.32 75.56,20.95 75.25,20.95 74.93,21.27 | v30.48,15.24 30.48,17.78 LED3.A
  Bottom 0.61: 69.85,21.59 66.04,21.59
  Bottom 0.813: LED3.A 31.91,21.75 33.02,22.86 38.1,22.86 R31.2 | 37.87,21.59 R31.2 | R31.2 R41.2 40.87,21.82 41.91,22.86 47.22,22.86 R42.2 50.8,21.82 R47.2 58.09,21.82 Q21.4
  pour Bottom (no thermals): 55.24,22.23 76.83,22.23 76.83,19.05 55.24,19.05
V-  (via drill 0.5)  (3 unrouted)
  Top 0.406: v30.8,4 30.48,4.32 30.48,8.89 32.57,10.98 R37.1 | C20.- 50.8,3.81 | 50.8,3.81 43.31,3.81 C15.2 43.08,3.58 R67.2 39.37,3.58 38.84,4.12 U9.1 37.59,3.96 C29.1 | v50.8,2.4 50.8,3.81
  Bottom 0.406: 58.42,3.81 50.8,3.81 v50.8,2.4
  Bottom 0.61: 58.19,3.58 58.42,3.81 | 66.04,2.54 Q24.4 66.04,3.81 | Q28.4 73.66,5.08
  Bottom 0.813: LED4.C 31.75,6.83 31.75,3.81 | 58.19,3.58 R48.1 R39.1 48.03,3.58 46.99,2.54 41.68,2.54 R67.2 R45.1 38.1,2.54 33.02,2.54 31.75,3.81 | v30.8,4 31.56,4 31.75,3.81
  pour Bottom (no thermals): 55.24,2.54 76.83,2.54 76.83,5.71 55.24,5.71